# EAGLE board Heltec_wifi_kit_32_breakout (EAGLE 8.5.2)
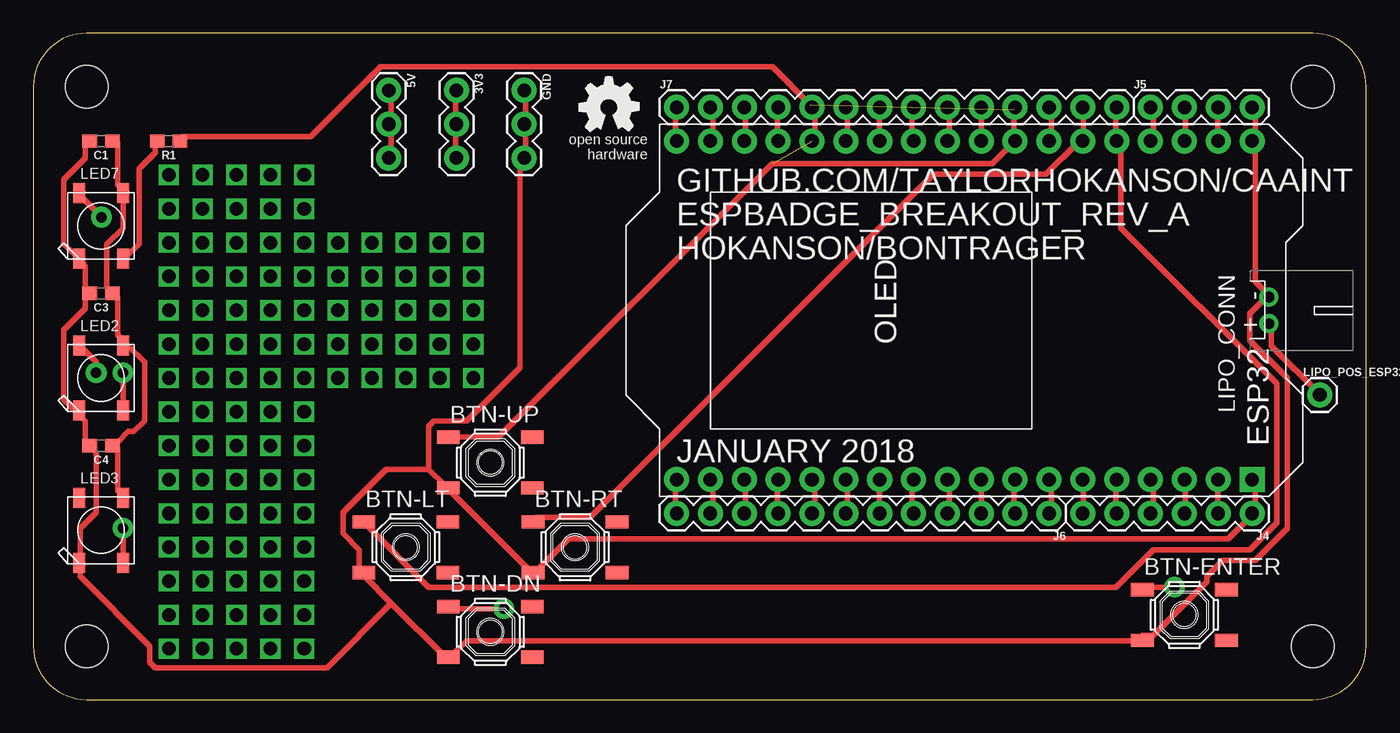
[diagram p0: board, top side]
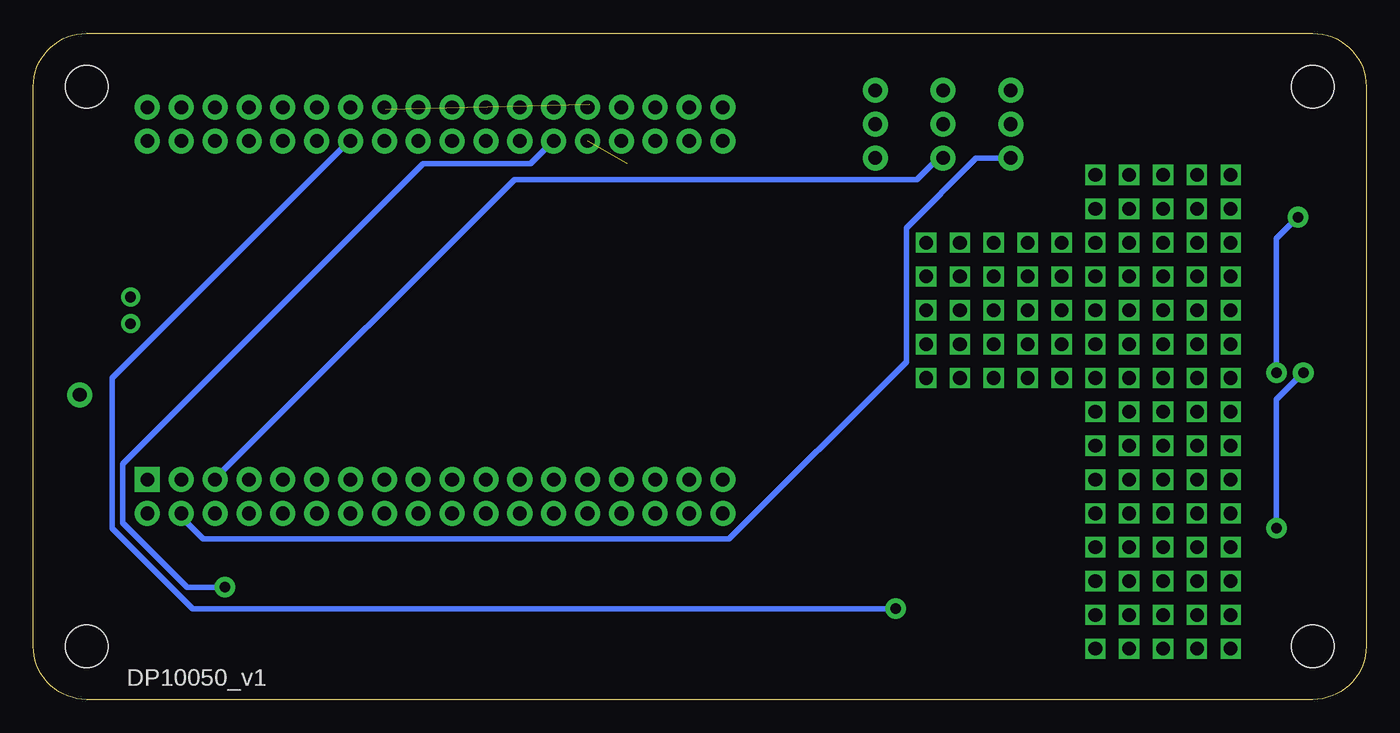
[diagram p1: board, bottom side, seen from below]

Size 100 x 50 mm. Coordinates in mm from the lower left corner, seen from the top.
Copper layers (1*16): Top 0.035mm / dielectric 1.5mm / Bottom 0.035mm
Design rules "OthermillDRC_1_64_v2": minimum track width 16mil, minimum drill 31mil, track to track 0.39878125mm, track to pad 0.39878125mm, pad to pad 0.39878125mm, via to via 0.39878125mm, smd to smd 0mil, copper to edge 0mil, drill to drill 1mil, minimum pad ring 0mil, minimum via ring 15mil, stop-mask expansion 1mil, vias tented up to drill 30mil, thermal gap 10mil

## Footprints (pad centres in the part's own frame; a part is rotated, then mirrored left to right if it is on the bottom)
1X03 = drill 1.016 pad 1.88: 1 0,0; 2 2.54,0; 3 5.08,0
SW_TACT_SMALL = smd 1.7 x 1: 1 -3.15,1.9; 2 3.15,1.9; 3 -3.15,-1.9; 4 3.15,-1.9
0603 = smd 1.1 x 1: 1 -0.85,0; 2 0.85,0
HELTEC-WIFI-KIT-32 = drill 1.016 pad 1.88: 0 0,20.32; 2 0,17.78; 3V3 0,5.08; 3V3_2 25.4,5.08; 4 0,22.86; 5 0,30.48; 5V 0,2.54; 5V_2 25.4,2.54; 12 25.4,12.7; 13 25.4,10.16; 14 25.4,15.24; 15 0,15.24; 16 0,25.4; 17 0,27.94; 18 0,33.02; 19 0,38.1; 21 0,43.18; 22 0,40.64; 23 0,35.56; 25 25.4,22.86; 26 25.4,20.32; 27 25.4,17.78; 32 25.4,27.94; 33 25.4,25.4; 34 25.4,33.02; 35 25.4,30.48; 36 25.4,43.18; 37 25.4,40.64; 38 25.4,38.1; 39 25.4,35.56; GND_2 0,7.62; GND_3 25.4,0; RST 25.4,7.62; RX 0,12.7; TX 0,10.16 | drill 1.016 pad 1.88 square: GND 0,0
1X06 = drill 1.016 pad 1.88: 1 0,0; 2 2.54,0; 3 5.08,0; 4 7.62,0; 5 10.16,0; 6 12.7,0
1X04 = drill 1.016 pad 1.88: 1 0,0; 2 2.54,0; 3 5.08,0; 4 7.62,0
1X12 = drill 1.016 pad 1.88: 1 0,0; 2 2.54,0; 3 5.08,0; 4 7.62,0; 5 10.16,0; 6 12.7,0; 7 15.24,0; 8 17.78,0; 9 20.32,0; 10 22.86,0; 11 25.4,0; 12 27.94,0
1X14 = drill 1.016 pad 1.88: 1 0,0; 2 2.54,0; 3 5.08,0; 4 7.62,0; 5 10.16,0; 6 12.7,0; 7 15.24,0; 8 17.78,0; 9 20.32,0; 10 22.86,0; 11 25.4,0; 12 27.94,0; 13 30.48,0; 14 33.02,0
WS2812B = smd 1.5 x 0.9: 1-VDD 2.45,-1.65; 2-DOUT 2.45,1.65; 3-GND -2.45,1.65; 4-DIN -2.45,-1.65
JST-PH-2-THM-RA = drill 0.8 pad 1.422: 1 1,0; 2 -1,0
1X01 = drill 1.016 pad 1.88: 1 0,0
PROTO_VIAS_05X05 = drill 1.016 square: 1 -5.08,5.08; 2 -2.54,5.08; 3 0,5.08; 4 2.54,5.08; 5 5.08,5.08; 6 -5.08,2.54; 7 -2.54,2.54; 8 0,2.54; 9 2.54,2.54; 10 5.08,2.54; 11 -5.08,0; 12 -2.54,0; 13 0,0; 14 2.54,0; 15 5.08,0; 16 -5.08,-2.54; 17 -2.54,-2.54; 18 0,-2.54; 19 2.54,-2.54; 20 5.08,-2.54; 21 -5.08,-5.08; 22 -2.54,-5.08; 23 0,-5.08; 24 2.54,-5.08; 25 5.08,-5.08
DP10050_V1 = hole 3.2: 4,4; 96,4; 96,46; 4,46

## Placement (x,y rotation side)
3V3  [1X03]  31.75,45.72 270 top
5V  [1X03]  26.67,45.72 270 top
BTN-DN  [SW_TACT_SMALL]  34.29,5.08 0 top
BTN-ENTER  [SW_TACT_SMALL]  86.36,6.35 0 top
BTN-LT  [SW_TACT_SMALL]  27.94,11.43 0 top
BTN-RT  [SW_TACT_SMALL]  40.64,11.43 0 top
BTN-UP  [SW_TACT_SMALL]  34.29,17.78 0 top
C1  0.1uF  [0603]  5.08,41.91 180 top
C3  0.1uF  [0603]  5.08,30.48 180 top
C4  0.1uF  [0603]  5.08,19.05 180 top
ESP32  HELTEC-WIFI-KIT-32  [HELTEC-WIFI-KIT-32]  91.44,16.51 90 top
GND  [1X03]  36.83,45.72 270 top
J4  [1X06]  91.44,13.97 180 top
J5  [1X04]  83.82,44.45 0 top
J6  [1X12]  76.2,13.97 180 top
J7  [1X14]  48.26,44.45 0 top
LED2  WS2812B5050  [WS2812B]  5.08,24.13 90 top
LED3  WS2812B5050  [WS2812B]  5.08,12.7 90 top
LED7  WS2812B5050  [WS2812B]  5.08,35.56 90 top
LIPO_CONN  [JST-PH-2-THM-RA]  92.71,29.21 270 top
LIPO_POS_ESP32  [1X01]  96.52,22.86 0 top
P1  PROTO_VIAS_05X05  [PROTO_VIAS_05X05]  15.24,21.59 0 top
P2  PROTO_VIAS_05X05  [PROTO_VIAS_05X05]  15.24,8.89 0 top
P3  PROTO_VIAS_05X05  [PROTO_VIAS_05X05]  27.94,29.21 0 top
P4  PROTO_VIAS_05X05  [PROTO_VIAS_05X05]  15.24,34.29 0 top
R1  330  [0603]  10.16,41.91 180 top
U$2  [OSHW_5MM]  43.18,44.45 0 top
U$3  [DP10050_V1]  0,0 0 top

## Library data of the parts
3V3 5V GND J6 J7 LIPO_POS_ESP32 = SparkFun-Connectors
BTN-DN BTN-ENTER BTN-LT BTN-RT BTN-UP P1-P4 = dp_devices.v6
C1 C3 C4 = SparkFun-Capacitors; PROD_ID: CAP-00810
ESP32 = NickParts
J4 = SparkFun-Connectors; PROD_ID: CONN-08437
J5 = SparkFun-Connectors; PROD_ID: CONN-09696
LED2 LED3 LED7 LIPO_CONN = adafruit
R1 = SparkFun-Resistors; PROD_ID: RES-00818
U$2 = oshw
U$3 = dp_pcb

## Nets
5V: C1.1 C3.1 C4.1 LED2.1-VDD LED3.1-VDD LED7.1-VDD
BTN-DN: BTN-DN.1 ESP32.14 J7.12
BTN-ENTER: BTN-ENTER.1 ESP32.35 J7.6
BTN-LT: BTN-LT.1 ESP32.13 J7.14
BTN-RT: BTN-RT.1 ESP32.12 J7.13
BTN-UP: BTN-UP.1 ESP32.34 J7.5
GND: BTN-DN.3 BTN-ENTER.3 BTN-LT.3 BTN-RT.3 BTN-UP.3 C1.2 C3.2 C4.2 ESP32.GND ESP32.GND_3 GND.1 GND.2 GND.3 J4.1 J5.4 LED2.3-GND LED3.3-GND LED7.3-GND LIPO_CONN.2
LED-IN: ESP32.27 J7.11 R1.1
N$1: ESP32.36 J7.1
N$2: LIPO_CONN.1 LIPO_POS_ESP32.1
N$3: LED2.4-DIN LED7.2-DOUT
N$4: 5V.1 5V.2 5V.3 ESP32.5V J4.2
N$5: ESP32.15 J6.1
N$6: ESP32.GND_2 J4.4
N$7: ESP32.TX J4.5
N$8: ESP32.RX J4.6
N$9: ESP32.5V_2 J5.3
N$10: ESP32.3V3_2 J5.2
N$11: ESP32.RST J5.1
N$12: ESP32.21 J6.12
N$13: ESP32.22 J6.11
N$14: ESP32.19 J6.10
N$15: ESP32.23 J6.9
N$16: ESP32.18 J6.8
N$17: ESP32.5 J6.7
N$18: ESP32.17 J6.6
N$19: ESP32.16 J6.5
N$20: 3V3.1 3V3.2 3V3.3 ESP32.3V3 J4.3
N$21: ESP32.2 J6.2
N$22: ESP32.0 J6.3
N$23: ESP32.4 J6.4
N$24: LED2.2-DOUT LED3.4-DIN
N$25: ESP32.37 J7.2
N$26: ESP32.38 J7.3
N$27: ESP32.39 J7.4
N$29: LED7.4-DIN R1.2
N$30: ESP32.32 J7.7
N$31: ESP32.33 J7.8
N$32: ESP32.25 J7.9
N$33: ESP32.26 J7.10

## Tracks (layer width: path | path; a pad name or v marks a point on that pad's centre or on a via)
5V
  Top 0.406: C1.1 6.32,41.84 6.32,38.62 6.73,38.22 LED7.1-VDD 6.73,37.81 6.73,35.4 5.52,34.19 5.52,30.97 5.92,30.57 C3.1 6.32,30.17 6.32,27.35 6.73,26.94 LED2.1-VDD 7.13,26.54 8.34,25.33 8.34,20.91 7.53,20.1 7.13,20.1 6.32,19.3 C4.1 6.32,18.89 6.32,15.67 6.73,15.27 LED3.1-VDD
BTN-DN  (via drill 0.79)
  Top 0.406: v35.31,6.82 31.29,6.82 BTN-DN.1 | J7.12 76.38,44.26 76.38,42.24 ESP32.14
  Bottom 0.406: v35.31,6.82 88.05,6.82 94.09,12.85 94.09,24.13 76.38,41.84 ESP32.14
BTN-ENTER  (via drill 0.79)
  Top 0.406: v85.64,8.43 83.22,8.43 BTN-ENTER.1 | J7.6 61.08,44.26 61.08,42.24 ESP32.35
  Bottom 0.406: v85.64,8.43 88.45,8.43 93.28,13.26 93.28,17.68 70.74,40.23 62.69,40.23 61.08,41.84 ESP32.35
BTN-LT
  Top 0.406: BTN-LT.1 24.84,13.26 29.68,8.43 81.21,8.43 84.03,11.24 91.27,11.24 93.28,13.26 93.28,23.72 81.61,35.4 81.61,41.84 ESP32.13 81.21,42.24 81.21,44.26 J7.14
BTN-RT
  Top 0.406: BTN-RT.1 37.73,13.66 41.75,13.66 67.52,39.42 75.97,39.42 78.39,41.84 ESP32.12 78.79,42.24 78.79,44.26 J7.13
BTN-UP  (1 unrouted)
  Top 0.406: 73.56,41.84 71.95,40.23 55.44,40.23 34.91,19.7 31.29,19.7 BTN-UP.1 | ESP32.34 58.66,42.24 58.66,44.26 J7.5
GND
  Top 0.406: J5.4 91.67,44.26 91.67,42.24 ESP32.GND_3 91.67,41.84 91.67,31.37 92.48,30.57 LIPO_CONN.2 92.48,30.17 91.27,28.96 91.27,26.94 94.09,24.13 94.09,12.85 91.67,10.44 89.26,10.44 88.05,9.23 88.05,8.83 84.03,4.8 83.22,4.8 BTN-ENTER.3 82.82,4.4 32.49,4.4 31.29,3.19 BTN-DN.3 30.88,3.19 26.86,7.22 | C1.2 3.91,41.84 3.91,40.63 2.3,39.02 2.3,34.19 3.1,33.39 LED7.3-GND 3.51,32.98 3.91,32.58 3.91,30.57 C3.2 3.91,30.17 3.91,29.36 2.3,27.75 2.3,22.52 3.1,21.71 LED2.3-GND 3.51,21.31 3.91,20.91 3.91,19.3 C4.2 4.31,18.89 4.71,18.49 4.71,14.06 3.51,12.85 3.51,10.44 LED3.3-GND 3.51,10.04 3.51,9.23 8.74,4 8.74,2.79 9.14,2.39 22.03,2.39 26.86,7.22 | 26.86,7.22 24.84,9.23 BTN-LT.3 24.44,9.63 24.44,11.24 23.23,12.45 23.23,14.06 26.45,17.28 29.68,17.28 | GND.1 36.92,45.46 36.92,43.45 GND.2 36.92,43.05 36.92,41.03 GND.3 36.52,40.63 36.52,24.93 32.49,20.91 30.08,20.91 29.68,20.5 29.68,17.28 | ESP32.GND 91.67,16.48 91.67,14.06 J4.1 91.27,13.66 89.66,12.05 40.14,12.05 37.73,9.63 BTN-RT.3 37.32,9.63 31.29,15.67 BTN-UP.3 30.88,16.07 29.68,17.28
LED-IN  (1 unrouted)
  Top 0.406: 58.26,44.66 55.44,47.48 26.05,47.48 20.82,42.24 11.16,42.24 R1.1 | J7.11 73.56,44.26 73.56,42.24 ESP32.27
N$1
  Top 0.406: ESP32.36 48.19,42.24 48.19,44.26 J7.1
N$2
  Top 0.406: LIPO_CONN.1 92.88,28.15 92.88,26.54 96.51,22.92 LIPO_POS_ESP32.1
N$3  (via drill 0.79)
  Top 0.406: v6.73,24.53 6.73,21.71 LED2.4-DIN | v5.12,36.2 3.51,37.81 LED7.2-DOUT
  Bottom 0.406: v6.73,24.53 6.73,34.59 v5.12,36.2
N$4
  Top 0.406: J4.2 88.86,14.06 88.86,16.48 ESP32.5V | 5V.3 26.86,41.03 26.86,43.05 5V.2 26.86,43.45 26.86,45.46 5V.1
  Bottom 0.406: J4.2 88.86,13.66 87.25,12.05 47.79,12.05 34.51,25.33 34.51,35.4 29.27,40.63 26.86,40.63 5V.3
N$5
  Top 0.406: J6.1 76.38,14.06 76.38,16.48 ESP32.15
N$6
  Top 0.406: J4.4 84.03,14.06 84.03,16.48 ESP32.GND_2
N$7
  Top 0.406: J4.5 81.21,14.06 81.21,16.48 ESP32.TX
N$8
  Top 0.406: J4.6 78.79,14.06 78.79,16.48 ESP32.RX
N$9
  Top 0.406: ESP32.5V_2 88.86,42.24 88.86,44.26 J5.3
N$10
  Top 0.406: ESP32.3V3_2 86.44,42.24 86.44,44.26 J5.2
N$11
  Top 0.406: ESP32.RST 84.03,42.24 84.03,44.26 J5.1
N$12
  Top 0.406: J6.12 48.19,14.06 48.19,16.48 ESP32.21
N$13
  Top 0.406: J6.11 51.01,14.06 51.01,16.48 ESP32.22
N$14
  Top 0.406: J6.10 53.43,14.06 53.43,16.48 ESP32.19
N$15
  Top 0.406: J6.9 55.84,14.06 55.84,16.48 ESP32.23
N$16
  Top 0.406: J6.8 58.66,14.06 58.66,16.48 ESP32.18
N$17
  Top 0.406: J6.7 61.08,14.06 61.08,16.48 ESP32.5
N$18
  Top 0.406: J6.6 63.49,14.06 63.49,16.48 ESP32.17
N$19
  Top 0.406: J6.5 65.91,14.06 65.91,16.48 ESP32.16
N$20
  Top 0.406: J4.3 86.44,14.06 86.44,16.48 ESP32.3V3 | 3V3.3 31.69,41.03 31.69,43.05 3V3.2 31.69,43.45 31.69,45.46 3V3.1
  Bottom 0.406: ESP32.3V3 86.04,16.88 63.89,39.02 33.7,39.02 32.09,40.63 3V3.3
N$21
  Top 0.406: J6.2 73.56,14.06 73.56,16.48 ESP32.2
N$22
  Top 0.406: J6.3 71.14,14.06 71.14,16.48 ESP32.0
N$23
  Top 0.406: J6.4 68.73,14.06 68.73,16.48 ESP32.4
N$24  (via drill 0.79)
  Top 0.406: v6.73,12.85 6.73,10.44 LED3.4-DIN | v4.71,24.53 4.71,25.33 3.51,26.54 LED2.2-DOUT
  Bottom 0.406: v6.73,12.85 6.73,22.52 v4.71,24.53
N$25
  Top 0.406: ESP32.37 51.01,42.24 51.01,44.26 J7.2
N$26
  Top 0.406: ESP32.38 53.43,42.24 53.43,44.26 J7.3
N$27
  Top 0.406: ESP32.39 55.84,42.24 55.84,44.26 J7.4
N$29
  Top 0.406: R1.2 9.14,41.84 9.14,41.03 7.93,39.83 7.93,34.19 7.13,33.39 LED7.4-DIN
N$30
  Top 0.406: ESP32.32 63.49,42.24 63.49,44.26 J7.7
N$31
  Top 0.406: ESP32.33 65.91,42.24 65.91,44.26 J7.8
N$32
  Top 0.406: ESP32.25 68.73,42.24 68.73,44.26 J7.9
N$33
  Top 0.406: ESP32.26 71.14,42.24 71.14,44.26 J7.10

## Text on the board
_tsilk: GITHUB.COM/TAYLORHOKANSON/CAAINT | ESPBADGE_BREAKOUT_REV_A | HOKANSON/BONTRAGER | JANUARY 2018